# Altium PCB PCB2.PcbDoc
Units mm, origin at the board's own origin, x right, y up, seen from the top; angles counter-clockwise.
Board outline 152.4 x 101.6 mm, 2 copper layers (Top Layer, Bottom Layer); 11 components, 12 nets, 83 pads, 3 vias.
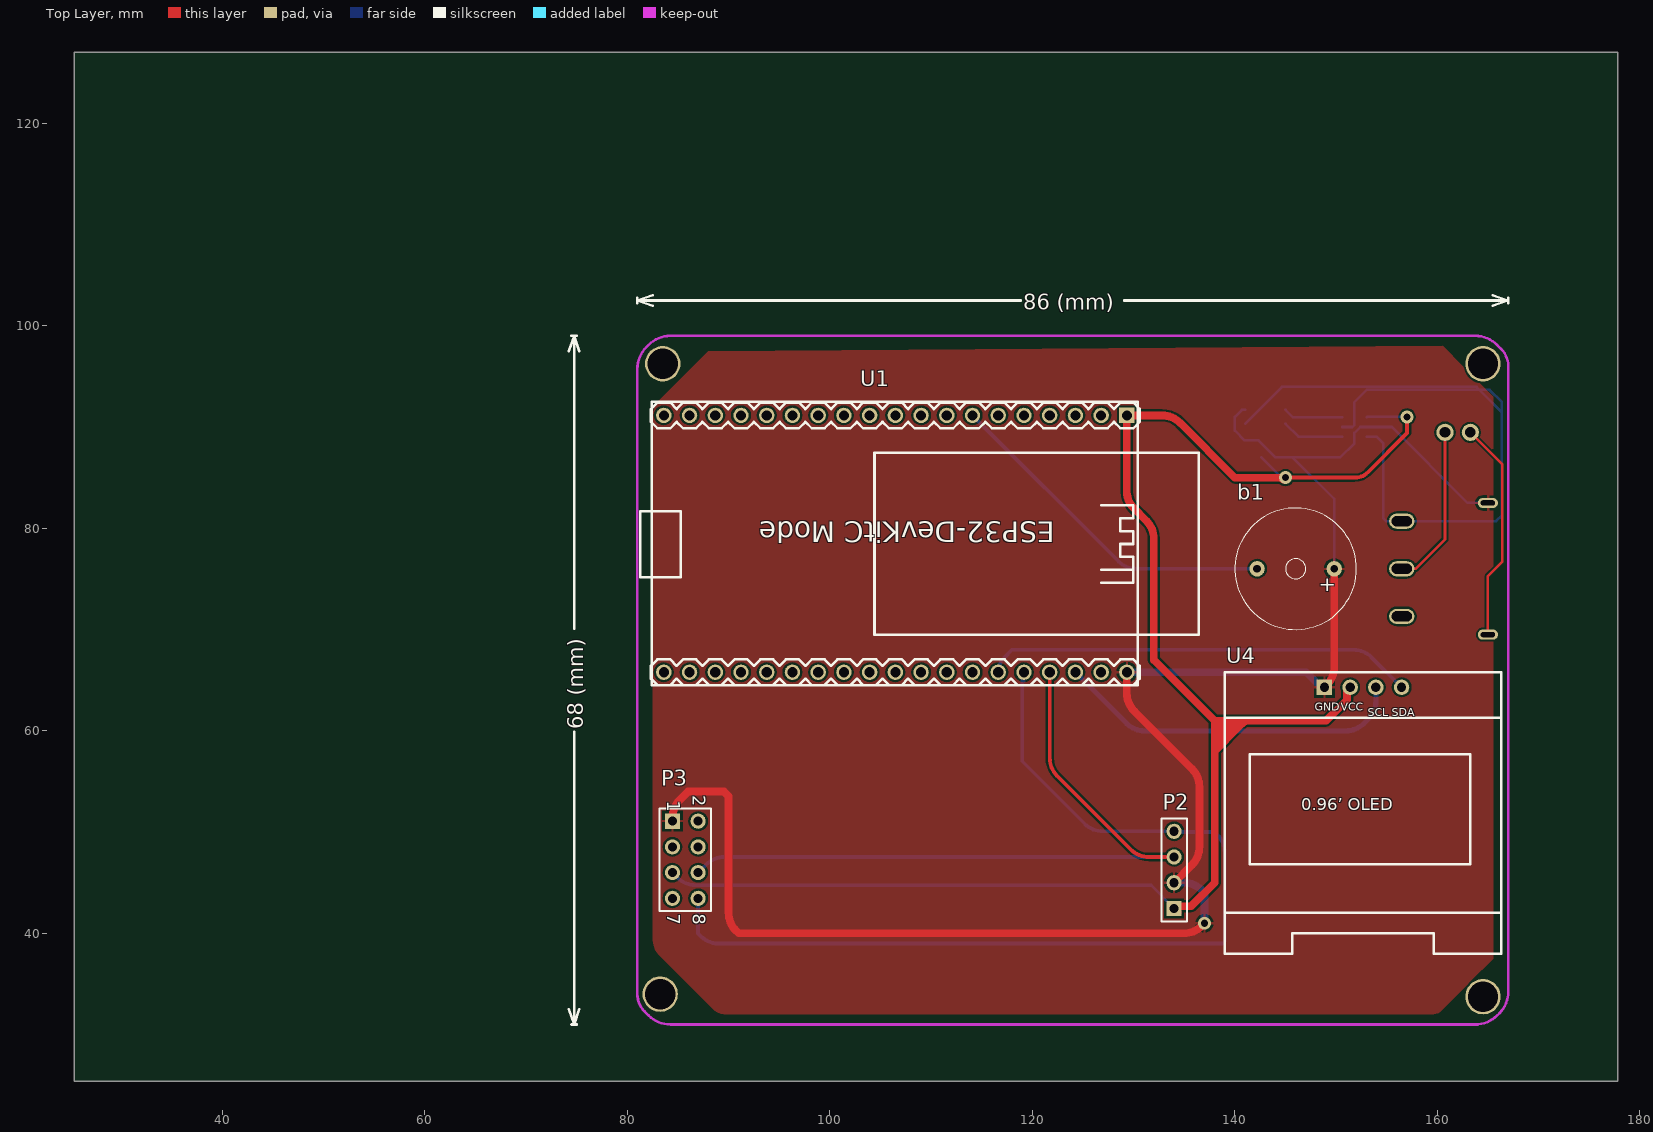
[diagram p0: Top Layer view]
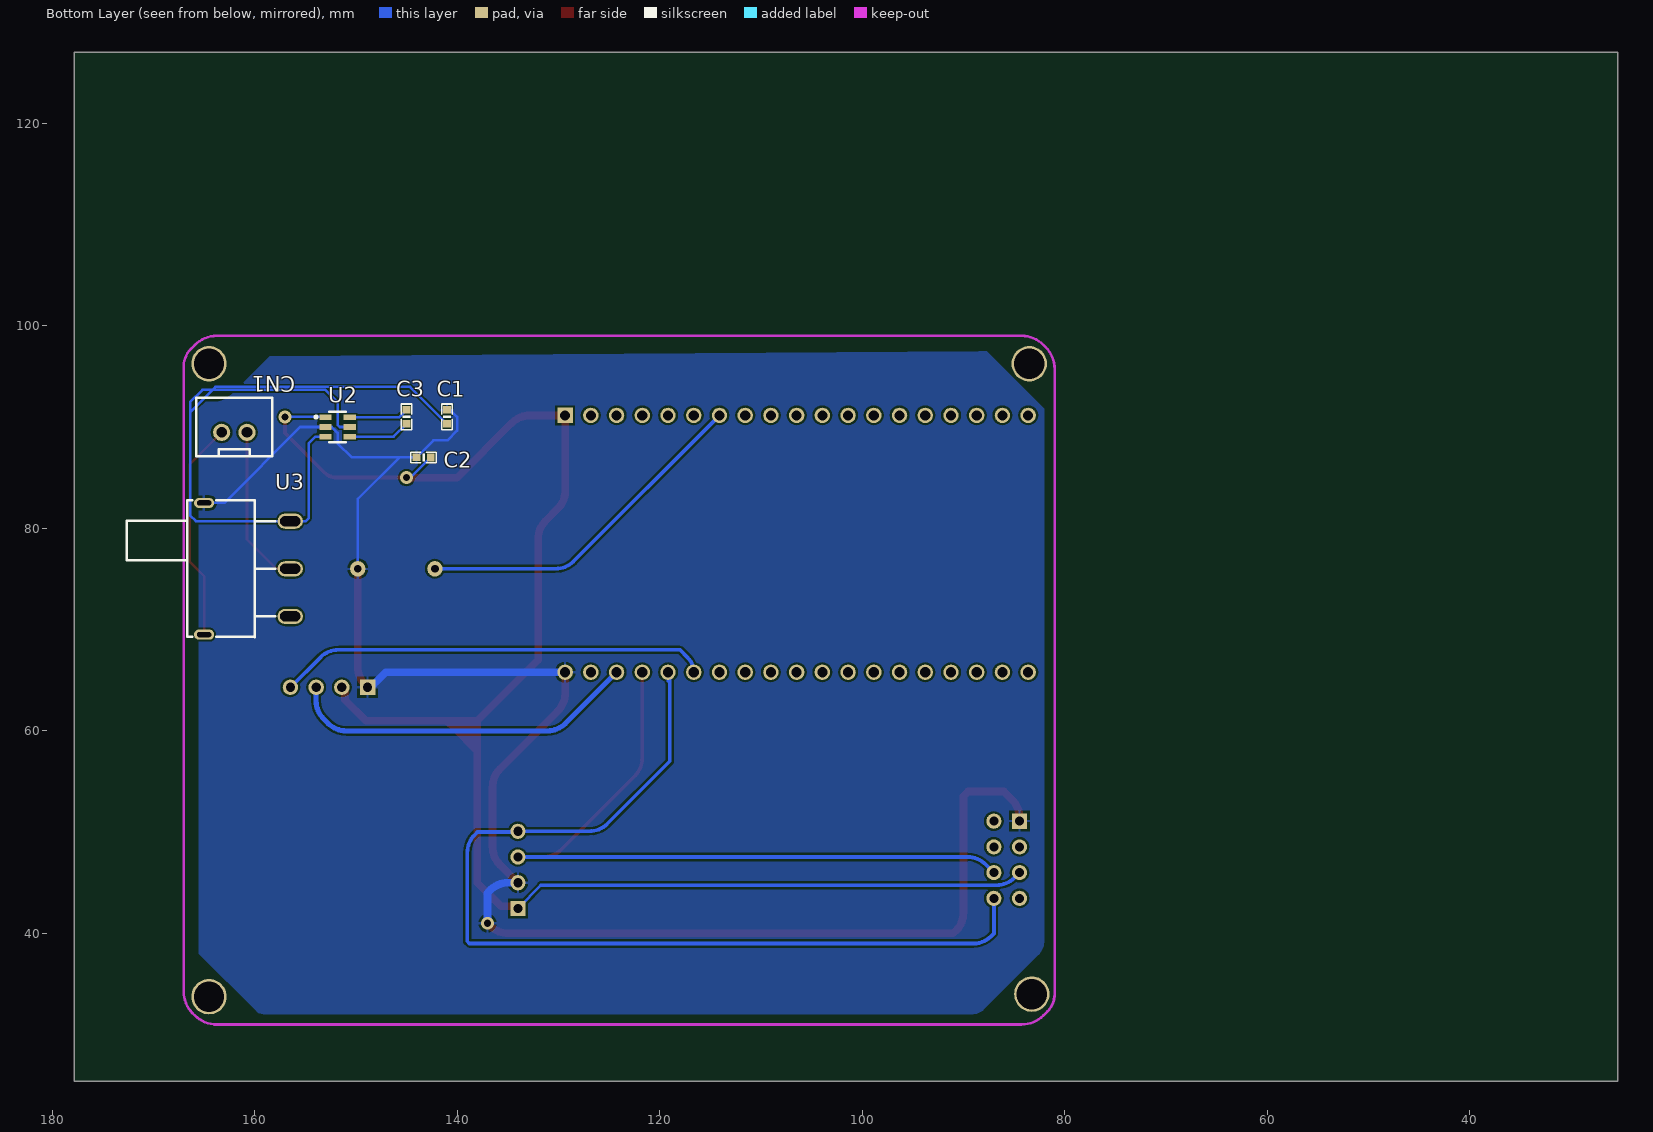
[diagram p1: Bottom Layer view, seen from below]
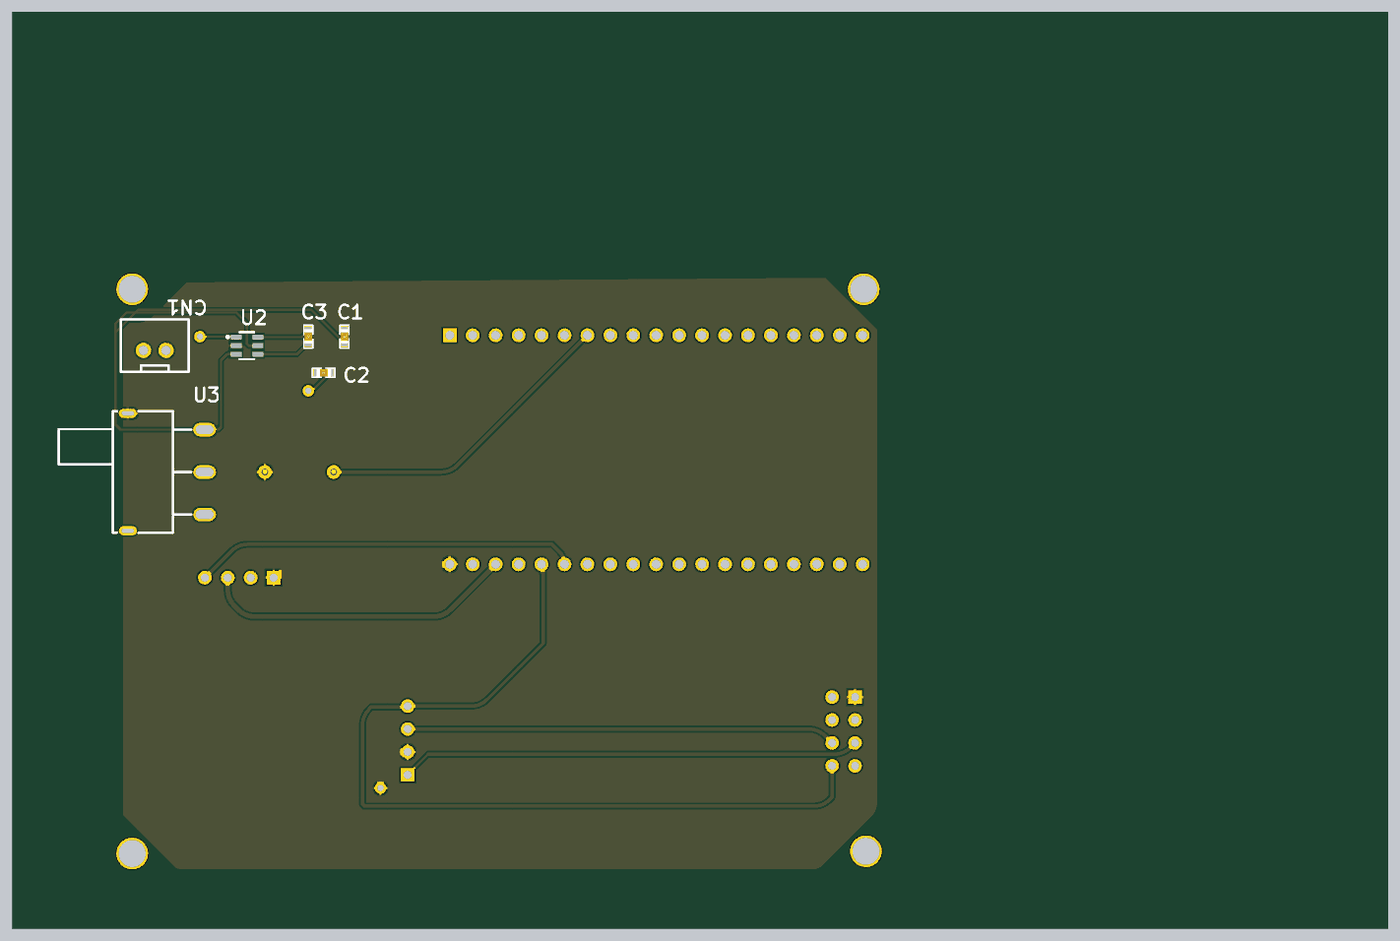
[diagram p2: 3D render of the assembled board from below, using the file's embedded part models]

## Layer stack, top to bottom
Top Solder: solder mask 0.0102, Solder Resist, Dk 3.5
Top Layer: signal copper 0.0356
Dielectric 1: dielectric 0.32, FR-4, Dk 4.8
Bottom Layer: signal copper 0.0356
Bottom Solder: solder mask 0.0102, Solder Resist, Dk 3.5

## Board outline
25.4,25.4 177.8,25.4 177.8,127 25.4,127

## Design rules (kind name [scope] priority, off if disabled: settings)
Clearance [All] p1: gap=0.203 ignorepadtopadclearanceinfootprint=FALSE
PolygonConnect [All] p1: connectstyle=Relief reliefconductorwidth=0.254 reliefentries=4 polygonreliefangle="90 Angle" airgapwidth=0.254
RoutingVias [All] p1: holewidth=0.711 width=1.27 viastyle="Through Hole" minholewidth=0.711 minwidth=1.27 maxholewidth=0.711 maxwidth=1.27
SolderMaskExpansion [All] p1: expansion=0.102
Width [All] p1: maxlimit=2 minlimit=0.254 preferedwidth=0.254 minimp=50.000000 maximp=50.000000 favimp=50.000000
30 further rules are at their usual default settings.

## Components (designator, comment, footprint, x,y, rotation, side; value= is the part's Value field where it differs from the comment)
b1 "BEEP" beep 146,76 r180 top
C1 "2.2uf" C_0603 141.003,91 r90 bottom
C2 "2.2uf" C_0603 143.314,87 r180 bottom
C3 "2.2uf" C_0603 145,91 r90 bottom
CN1 "" CONN-TH_2P-P2.50-XH2.54-2P 162,90 r0 bottom
P2 "Header 4" HDR1X4 134,42.46 r90 top
P3 "Header 4X2" HDR2X4 84.46,51.08 r270 top
U1 "" ESP32DEVKITC 108.839,78.486 r180 top
U2 "" SOT-23-6_L2.9-W1.6-P0.95-LS2.8-BL-1 152.026,90 r270 bottom
U3 "" SW-TH_KH-SS12D11-G5 164,76 r270 bottom
U4 "" 0.96OLEDIIC 152.653,51.9 r0 top

## Footprints (in the part's own frame and the unit in brackets; to place one, negate y for a bottom-side part, rotate by r counter-clockwise, add the part's x,y. Pads: shape width x height; smd on the part's side, far side on the other; paste and mask are expansions set on the pad)
0.96OLEDIIC [mm]
  rect 1.524x1.524 hole 0.914 paste+0 mask+0.102: GND(-3.812,12.4)
  round 1.524 hole 0.914 paste+0 mask+0.102: SCL(1.268,12.4) SDA(3.808,12.4) VCC(-1.272,12.4)
  round 2.5 on Top Overlay paste+0 mask+0.5: ""(-11.653,-11.9) ""(-11.653,11.9) ""(11.647,-11.9) ""(11.647,11.9)
  silkscreen extent -13.65,-13.9 13.65,13.9
beep [mil] "蜂鸣器"
  round 60 hole 30: 1(-150,0) 2(150,0)
  silkscreen extent -236,-236 236,236, body extent -236,-238 236,234, height 366
C_0603 [mil] "Chip Resistor, 2-Leads, Body 1.6x0.8mm, IPC Medium Density"
  rect 30x30 smd: 1(-27,0) 2(27.5,-0.06)
  silkscreen extent -50,-20 50,20, body extent -50,-20 53,19, height 35
CONN-TH_2P-P2.50-XH2.54-2P [mm]
  round 1.7 hole 1.05 paste+0 mask+0.05: 1(1.25,0.525) 2(-1.25,0.525)
  silkscreen extent -3.75,-2.9 3.75,2.9
ESP32DEVKITC [mil]
  rect 60x60 hole 39.37 paste+0 mask+4: 1(-806.88,-498.42)
  round 60 hole 39.37 paste+0 mask+4: 2(-706.88,-498.42) 3(-606.88,-498.42) 4(-506.88,-498.42) 5(-406.88,-498.42) 6(-306.88,-498.42) 7(-206.88,-498.42) 8(-106.88,-498.42) 9(-6.88,-498.42) 10(93.12,-498.42) 11(193.12,-498.42) 12(293.12,-498.42) 13(393.12,-498.42) 14(493.12,-498.42) 15(593.12,-498.42) 16(693.12,-498.42) 17(793.12,-498.42) 18(893.12,-498.42) 19(993.12,-498.42) 20(993.11,500) 21(893.11,500) 22(793.11,500) 23(693.12,500) 24(593.12,500) 25(493.12,500) 26(393.12,500) 27(293.12,500) 28(193.12,500) 29(93.12,500) 30(-6.88,500) 31(-106.88,500) 32(-206.88,500) 33(-306.88,500) 34(-406.88,500) 35(-506.88,500) 36(-606.88,500) 37(-706.88,500) 38(-806.88,500)
  silkscreen extent -1086,-551 1086,551
HDR1X4 [mm] "Connector; Header; 4 Position"
  rect 1.5x1.5 hole 0.9: 1(0,0)
  round 1.5 hole 0.9: 2(2.54,0) 3(5.08,0) 4(7.62,0)
  silkscreen extent -1.27,-1.27 8.89,1.27
HDR2X4 [mm] "Connector; Header; 4x2 Position"
  rect 1.5x1.5 hole 0.9: 1(0,0)
  round 1.5 hole 0.9: 2(0,2.54) 3(2.54,0) 4(2.54,2.54) 5(5.08,0) 6(5.08,2.54) 7(7.62,0) 8(7.62,2.54)
  silkscreen extent -1.27,-1.27 8.89,3.81
SOT-23-6_L2.9-W1.6-P0.95-LS2.8-BL-1 [mm]
  rect 0.55x1.2 smd paste+0 mask+0.051: 1(-0.95,-0.974) 2(0,-0.974) 3(0.95,-0.974) 4(0.95,1.426) 5(0,1.426) 6(-0.95,1.426)
  silkscreen extent -1.5,-2.03 1.5,1.03
SW-TH_KH-SS12D11-G5 [mm]
  oval 1.5x2.5 hole 1 slot 2 at 90 deg paste+0 mask+0.051: 1(-4.7,7.519) 2(0,7.519) 3(4.7,7.519)
  oval 1x2 hole 0.5 slot 1.4 at 90 deg paste+0 mask+0.051: 4(6.5,-0.981) 5(-6.5,-0.981)
  silkscreen extent -6.75,-8.64 6.75,6.04

## Part data
C1 C2 C3: library part C
CN1: library part XH2.54*2P_直插
P2: "Header, 4-Pin", LatestRevisionDate=17-Jul-2002, LatestRevisionNote="Re-released for DXP Platform.", Publisher="Altium Limited"
P3: "Header, 4-Pin, Dual row", LatestRevisionDate=17-Jul-2002, LatestRevisionNote="Re-released for DXP Platform.", Publisher="Altium Limited"
U1: library part ESP32DevKitC
U2: library part PW5410B
U3: library part KH-SS12D11-G5
U4: library part 0.96OLED_4P

## Free pads (board coordinates)
  round 3.5 hole 3: 1(164.5,33.75) 2(164.5,96.25) 3(83.5,96.25) 4(83.25,34)

## Via types
v1: diameter 1.27, hole 0.711, Top Layer to Bottom Layer, 3 vias

## Nets (pads, with @x,y where several pads share a name; then routed paths per layer and width w, separated by ;. In a path a pad name is that pad's centre, name@x,y a point inside that pad or via, vN(x,y) a via of type N, cw(c..) or ccw(c..) an arc to the next point about the centre after c; other vN are vias at no path point)
GND: b1.1 C1.2 C2.1 P2.2 P3.1 U1.38 U2.2 U3.5 U4.GND | length 176.7
  Top Layer w0.762: P3.1 84.46,51.408 cw(c87,51.408) 85.204,53.204 86,54 89.554,54 90,53.554 90,42.052 ccw(c92.54,42.052) 90.744,40.256 91,40 134.948,40 ccw(c134.948,42.54) 136.744,40.744 v1(137,41) ; U1.38 129.334,63.718 ccw(c131.874,63.718) 130.078,61.922 135.756,56.244 cw(c133.96,54.448) 136.5,54.448 136.5,48.552 cw(c133.96,48.552) 135.756,46.756 P2.2 ; U4.GND 149.066,64.526 ccw(c147.27,66.322) 149.81,66.322 b1.1
  Bottom Layer w0.254: C1.2 140.699,91.699 140,91 140,89.641 140.97,88.671 142.329,88.671 C2.1 145.703,87 ; b1.1 149.81,82.893 145.703,87 ; U3.5 162.991,82.5 155.491,90 U2.2 152.382,90 151.79,89.408 151.79,88.392 150.398,87 145.703,87
  Bottom Layer w0.762: U1.38 147.054,65.786 U4.GND@148.54,64.3 ; P2.2 134.948,45 cw(c134.948,42.46) 137,43.957 v1(137,41)
Netb1_2: b1.2 U1.7 | length 34.3
  Bottom Layer w0.381: U1.7 128.496,76.744 ccw(c130.292,78.54) 130.292,76 b1.2
NetC1_1: C1.1 U2.3 U2.5 U3.1 | length 79.6
  Bottom Layer w0.254: C1.1 144.644,93.955 163.855,93.955 164.135,93.675 ; U2.5 151.587,90 151.79,90.203 151.79,92.456 153.01,93.675 164.135,93.675 ; U2.3 154.003,89.05 154.661,88.392 154.661,80.979 154.94,80.7 U3.1 165.79,80.7 166.37,81.28 166.37,91.44 ; 164.135,93.675 166.37,91.44 ; 164.135,93.675 165.151,93.675 166.37,92.456 166.37,91.44
NetC3_1: C3.1 U2.4 | length 6.1
  Bottom Layer w0.254: C3.1 146.264,89.05 U2.4
NetC3_2: C3.2 U2.6 | length 5.9
  Bottom Layer w0.254: C3.2 145.747,90.95 U2.6
NetCN1_1: CN1.1 U3.4 | length 21.9
  Top Layer w0.254: CN1.1 166.421,86.304 166.421,76.708 164.981,75.269 U3.4
NetCN1_2: CN1.2 U3.2 | length 16
  Top Layer w0.254: U3.2 157.839,76 160.75,78.911 CN1.2
NetP2_3: P2.3 P3.6 U1.35 | length 72.7
  Top Layer w0.381: U1.35 121.714,57.338 ccw(c124.254,57.338) 122.458,55.542 129.716,48.284 ccw(c131.512,50.08) 131.512,47.54 P2.3
  Bottom Layer w0.381: P3.6 87.796,46.796 cw(c89.592,45) 89.592,47.54 P2.3
NetP2_4: P2.4 P3.8 U1.34 | length 98.2
  Bottom Layer w0.254: P3.8@86.995,43.46 P3.8 ; 119.174,64.906 U1.34
  Bottom Layer w0.381: P3.8 87,40 87.293,39.707 ccw(c89,41.414) 89,39 138.777,39 139,39.223 139,47.948 ccw(c136.46,47.948) 138.256,49.744 138,50 P2.4@134.193,50 ; U1.34 ccw(c119.593,65.366) 119,65.366 119,57 125.176,50.824 ccw(c126.972,52.62) 126.972,50.08 P2.4
NetU1_33: U1.33 U4.SDA | length 42.6
  Bottom Layer w0.381: U1.33 cw(c118.681,65.786) 117.233,67.233 118,68 151.708,68 cw(c151.708,65.46) 153.504,67.256 U4.SDA
NetU1_36: U1.36 U4.SCL | length 34.9
  Bottom Layer w0.508: U1.36 129.296,60.744 ccw(c131.092,62.54) 131.092,60 150.948,60 ccw(c150.948,62.54) 152.744,60.744 153.176,61.176 ccw(c151.38,62.972) 153.92,62.972 U4.SCL
VCC: C2.2 P2.1 P3.5 U1.1 U2.1 U4.VCC | length 162
  Top Layer w0.381: v1(145,85) 151.848,85 ccw(c151.848,86.807) 153.126,85.529 157,89.403 v1(157,91)
  Top Layer w0.762: P2.1@134.369,42.091 P2.1 ccw(c134,43.165) 134.498,42.666 135.666,42.666 138,45 138,61 ; v1(145,85) 145,84.956 144.829,84.785 ccw(c144.31,84.267) 144.31,85 140,85 134.598,90.402 ccw(c132.802,88.606) 132.802,91.146 U1.1 129.334,83.608 ccw(c131.608,83.608) 130,82 131.256,80.744 cw(c129.46,78.948) 132,78.948 132,67 138,61 ; U4.VCC@151.08,64.3 151.08,63.08 149,61 138,61
  Bottom Layer w0.254: 131.705,44.755 P2.1 ; C2.2 144.614,85 v1(145,85) ; U2.1 153.05,91 v1(157,91)
  Bottom Layer w0.381: P3.5 84.961,45.499 ccw(c86.757,47.295) 86.757,44.755 131.705,44.755
pads on no net: P3.2 P3.3 P3.4 P3.7 U1.2 U1.3 U1.4 U1.5 U1.6 U1.8 U1.9 U1.10 U1.11 U1.12 U1.13 U1.14 U1.15 U1.16 U1.17 U1.18 U1.19 U1.20 U1.21 U1.22 U1.23 U1.24 U1.25 U1.26 U1.27 U1.28 U1.29 U1.30 U1.31 U1.32 U1.37 U3.3 U4.

## Polygon pours and split planes (outlines as drawn)
GND on Top Layer "GND_L01_P018" (solid, pour order 18): 88,97.5 83.244,92.744 ccw(c85.04,90.948) 82.5,90.948 82.5,39.552 ccw(c85.04,39.552) 83.244,37.756 88.5,32.5 ccw(c89.707,33.707) 89.707,32 159.5,32 ccw(c159.5,33.207) 160.354,32.354 165.5,37.5 165.5,93 160.5,98
GND on Top Layer "GND_L01_P008" (solid, pour order 8): 80.75,99
GND on Top Layer "GND_L01_P004" (solid, pour order 4): 80.75,99
no net on Top Layer "NONET_L01_P000" (solid, pour order 0): 80.75,99
GND on Bottom Layer "GND_L02_P016" (solid, pour order 16): 88.5,97.5 87.707,97.5 82,91.793 82,39.5 ccw(c84.414,39.5) 82.707,37.793 88,32.5 ccw(c89.207,33.707) 89.207,32 159,32 ccw(c159,33.207) 159.854,32.354 165.5,38 165.5,92.5 164.052,92.5 cw(c164.052,95.04) 162.256,93.244 158.5,97

## Keep-outs
Keep-Out Layer:
  lines w0.254: 81,94.365 81,95.73 cw(c84.066,95.73) 81.898,97.898 82.102,98.102 cw(c84.27,95.934) 84.27,99 162,99 163.73,99 cw(c163.73,95.934) 165.898,98.102 166.293,97.707 cw(c164.586,96) 167,96 167,93 167,34.27 cw(c163.934,34.27) 166.102,32.102 165.898,31.898 cw(c163.73,34.066) 163.73,31 ; 81,94.73 81,94 81,34 ccw(c83.414,34) 81.707,32.293 82.102,31.898 ccw(c84.27,34.066) 84.27,31 164,31

## Other copper
Top Layer:
  region net VCC: 138,61 142.5,61 ccw(c142.5,58.586) 140.793,60.293 138,57.5

## Silkscreen, mask and mechanical layers (free items; w line width, h text height)
Top Overlay:
  lines w0.254: 74.242,32.524 74.75,31 ; 74.242,97.476 74.75,99 ; 74.496,31 75.004,31 ; 74.496,99 75.004,99 ; 74.75,59.896 74.75,31 ; 74.75,70.104 74.75,99 ; 75.258,32.524 74.75,31 ; 75.258,97.476 74.75,99 ; 80.976,102.238 80.976,102.746 ; 82.5,101.984 80.976,102.492 ; 82.5,103 80.976,102.492 ; 118.872,102.492 80.976,102.492 ; 129.08,102.492 166.976,102.492 ; 165.452,101.984 166.976,102.492 ; 165.452,103 166.976,102.492 ; 166.976,102.238 166.976,102.746
  text "86 (mm)" at 119.126,101.578 h1.52
  text "68 (mm)" at 75.664,60.15 h1.52 r90

## Text inside footprints (layer, text, board x,y; h text height)
b1: Top Overlay "+" at 150,75 h1.52 r180
P3: Top Overlay "2" at 86.492,53.62 h1.27 r270; Top Overlay "1" at 83.952,53.112 h1.27 r270; Top Overlay "7" at 83.952,41.936 h1.27 r270; Top Overlay "8" at 86.492,41.936 h1.27 r270
U1: Top Overlay "ESP32-DevKitC Mode" at 122.222,80.645 h2.03 r180
U4: Top Overlay "0.96’ OLED" at 146.529,51.739 h2.03; Top Overlay "SDA" at 155.51,61.463 h0.8; Top Overlay "SCL" at 153.097,61.463 h0.8; Top Overlay "VCC" at 150.43,61.971 h0.8; Top Overlay "GND" at 147.89,61.971 h0.8